# EAGLE board AS3364_DG412_bus_mixer_v1.0-old (EAGLE 7.7.0)

Size 88.88 x 49.2 mm. Coordinates in mm from the lower left corner, seen from the top.
Outline: 0,0 88.88,0 88.88,49.2 0,49.2 0,0
Copper layers (1*16): Top 0.035mm / dielectric 1.6mm / Bottom 0.035mm
Design rules "jlcpcb-2layers": minimum track width 5mil, minimum drill 0.3mm, track to track 5mil, track to pad 5mil, pad to pad 5mil, via to via 5mil, smd to smd 5mil, copper to edge 0.2mm, drill to drill 6mil, minimum pad ring 10mil, minimum via ring 3mil, stop-mask expansion 4mil, vias tented up to drill 0mil, thermal gap 10mil

## Footprints (pad centres in the part's own frame; a part is rotated, then mirrored left to right if it is on the bottom)
C0402 = smd 0.7 x 0.9: 1 -0.65,0; 2 0.65,0
DIL16J = drill 0.813: 1 -8.89,-3.81; 2 -6.35,-3.81; 3 -3.81,-3.81; 4 -1.27,-3.81; 5 1.27,-3.81; 6 3.81,-3.81; 7 6.35,-3.81; 8 8.89,-3.81; 9 8.89,3.81; 10 6.35,3.81; 11 3.81,3.81; 12 1.27,3.81; 13 -1.27,3.81; 14 -3.81,3.81; 15 -6.35,3.81; 16 -8.89,3.81
TSSOP24J = smd 0.305 x 0.991: 1 -3.575,-2.918; 2 -2.925,-2.918; 3 -2.275,-2.918; 4 -1.625,-2.918; 5 -0.975,-2.918; 6 -0.325,-2.918; 7 0.325,-2.918; 8 0.975,-2.918; 9 1.625,-2.918; 10 2.275,-2.918; 11 2.925,-2.918; 12 3.575,-2.918; 13 3.575,2.918; 14 2.925,2.918; 15 2.275,2.918; 16 1.625,2.918; 17 0.975,2.918; 18 0.325,2.918; 19 -0.325,2.918; 20 -0.975,2.918; 21 -1.625,2.918; 22 -2.275,2.918; 23 -2.925,2.918; 24 -3.575,2.918
TSSOP14J = smd 0.35 x 1: 1 -1.95,-2.825; 2 -1.3,-2.825; 3 -0.65,-2.825; 4 0,-2.825; 5 0.65,-2.825; 6 1.3,-2.825; 7 1.95,-2.825; 8 1.95,2.825; 9 1.3,2.825; 10 0.65,2.825; 11 0,2.825; 12 -0.65,2.825; 13 -1.3,2.825; 14 -1.95,2.825
TSSOP8J = smd 1.2 x 0.35: 1 -2.925,0.975; 2 -2.925,0.325; 3 -2.925,-0.325; 4 -2.925,-0.975; 5 2.925,-0.975; 6 2.925,-0.325; 7 2.925,0.325; 8 2.925,0.975
R0603 = smd 1 x 1.1: 1 -0.85,0; 2 0.85,0
R0402 = smd 0.6 x 0.7: 1 -0.5,0; 2 0.5,0
MA16-2WJ = drill 1.016 octagon: 1 -20.32,-1.27; 2 -20.32,1.27; 3 -17.78,-1.27; 4 -17.78,1.27; 5 -15.24,-1.27; 6 -15.24,1.27; 7 -12.7,-1.27; 8 -12.7,1.27; 9 -10.16,-1.27; 10 -10.16,1.27; 11 -7.62,-1.27; 12 -7.62,1.27; 13 -5.08,-1.27; 14 -5.08,1.27; 15 -2.54,-1.27; 16 -2.54,1.27; 17 0,-1.27; 18 0,1.27; 19 2.54,-1.27; 20 2.54,1.27; 21 5.08,-1.27; 22 5.08,1.27; 23 7.62,-1.27; 24 7.62,1.27; 25 10.16,-1.27; 26 10.16,1.27; 27 12.7,-1.27; 28 12.7,1.27; 29 15.24,-1.27; 30 15.24,1.27; 31 17.78,-1.27; 32 17.78,1.27

## Placement (x,y rotation side)
C1  100nF  [C0402]  16.51,20.32 0 top
C2  100nF  [C0402]  16.51,17.78 0 top
C3  100nF  [C0402]  41.91,20.32 0 top
C4  100nF  [C0402]  41.91,17.78 0 top
C5  100nF  [C0402]  67.31,20.32 0 top
C6  100nF  [C0402]  67.31,17.78 0 top
C7  100nF  [C0402]  8.89,35.56 0 top
C8  100nF  [C0402]  11.43,35.56 0 top
C9  100nF  [C0402]  30.48,36.83 0 top
C10  100nF  [C0402]  30.48,34.29 0 top
C11  100nF  [C0402]  58.42,36.83 0 top
C12  100nF  [C0402]  58.42,34.29 0 top
C13  5nF  [C0402]  7.62,12.7 0 top
C14  5nF  [C0402]  33.02,12.7 0 top
C15  5nF  [C0402]  58.42,12.7 0 top
C16  100nF  [C0402]  77.47,36.83 0 top
C17  100nF  [C0402]  77.47,34.29 0 top
C18  100nF  [C0402]  5.08,19.05 0 top
C19  100nF  [C0402]  31.75,17.78 0 top
C20  100nF  [C0402]  50.8,19.05 0 top
C21  100nF  [C0402]  59.69,17.78 0 top
C22  100nF  [C0402]  81.28,19.05 0 top
DA1  AS3364D  [DIL16J]  67.31,19.05 0 top
DA2  AS3364D  [DIL16J]  16.51,19.05 0 top
DA3  AS3364D  [DIL16J]  41.91,19.05 0 top
IC1  PCA9539PW  [TSSOP24J]  44.45,35.56 0 top
IC2  TL074JT  [TSSOP14J]  54.61,19.05 0 top
IC3  TL072JT  [TSSOP8J]  2.54,19.05 90 top
IC4  TL074JT  [TSSOP14J]  83.82,19.05 0 top
IC6  TL072JT  [TSSOP8J]  78.74,19.05 90 top
IC8  DG412-J  [DIL16J]  10.16,35.56 0 top
IC9  DG412-J  [DIL16J]  30.48,35.56 0 top
IC10  DG412-J  [DIL16J]  58.42,35.56 0 top
IC11  DG412-J  [DIL16J]  78.74,35.56 0 top
IC14  TL074JT  [TSSOP14J]  29.21,19.05 0 top
R1  1K  [R0603]  44.45,29.21 0 top
R2  33k  [R0402]  12.7,12.7 90 top
R3  22k  [R0402]  11.43,12.7 90 top
R4  47k  [R0402]  10.16,12.7 90 top
R5  33k  [R0402]  20.32,12.7 90 top
R6  22k  [R0402]  21.59,12.7 90 top
R7  47k  [R0402]  22.86,12.7 90 top
R8  33k  [R0402]  20.32,20.32 90 top
R9  22k  [R0402]  21.59,20.32 90 top
R10  47k  [R0402]  22.86,20.32 90 top
R11  33k  [R0402]  12.7,20.32 90 top
R12  22k  [R0402]  11.43,20.32 90 top
R13  47k  [R0402]  10.16,20.32 90 top
R14  33k  [R0402]  38.1,12.7 90 top
R15  22k  [R0402]  36.83,12.7 90 top
R16  47k  [R0402]  35.56,12.7 90 top
R17  33k  [R0402]  45.72,12.7 90 top
R18  22k  [R0402]  46.99,12.7 90 top
R19  47k  [R0402]  48.26,12.7 90 top
R20  33k  [R0402]  45.72,20.32 90 top
R21  22k  [R0402]  46.99,20.32 90 top
R22  47k  [R0402]  48.26,20.32 90 top
R23  33k  [R0402]  38.1,20.32 90 top
R24  22k  [R0402]  36.83,20.32 90 top
R25  47k  [R0402]  35.56,20.32 90 top
R26  33k  [R0402]  63.5,12.7 90 top
R27  22k  [R0402]  62.23,12.7 90 top
R28  47k  [R0402]  60.96,12.7 90 top
R29  33k  [R0402]  71.12,12.7 270 top
R30  22k  [R0402]  72.39,12.7 270 top
R31  47k  [R0402]  73.66,12.7 90 top
R32  33k  [R0402]  71.12,20.32 90 top
R33  22k  [R0402]  72.39,20.32 90 top
R34  47k  [R0402]  73.66,20.32 90 top
R35  33k  [R0402]  63.5,20.32 90 top
R36  22k  [R0402]  62.23,20.32 270 top
R37  47k  [R0402]  60.96,20.32 90 top
R38  100R  [R0402]  7.62,11.43 0 top
R39  100R  [R0402]  33.02,10.16 0 top
R40  100R  [R0402]  57.15,10.16 0 top
R41  47k  [R0402]  2.54,24.13 0 top
R42  47k  [R0402]  27.94,24.13 0 top
R43  47k  [R0402]  27.94,13.97 0 top
R44  47k  [R0402]  2.54,13.97 0 top
R45  47k  [R0402]  30.48,13.97 0 top
R46  47k  [R0402]  53.34,13.97 0 top
R47  47k  [R0402]  53.34,24.13 0 top
R48  47k  [R0402]  30.48,24.13 0 top
R49  47k  [R0402]  55.88,24.13 0 top
R50  47k  [R0402]  78.74,13.97 0 top
R51  47k  [R0402]  78.74,24.13 0 top
R52  47k  [R0402]  55.88,13.97 0 top
R53  47k  [R0402]  16.51,29.21 0 top
R54  47k  [R0402]  15.24,36.83 0 top
R55  47k  [R0402]  35.56,30.48 180 top
R56  47k  [R0402]  35.56,36.83 180 top
R57  47k  [R0402]  24.13,30.48 180 top
R58  47k  [R0402]  24.13,36.83 180 top
R59  47k  [R0402]  5.08,29.21 180 top
R60  47k  [R0402]  5.08,36.83 180 top
R61  47k  [R0402]  64.77,29.21 180 top
R62  47k  [R0402]  63.5,36.83 180 top
R63  47k  [R0402]  83.82,30.48 180 top
R64  47k  [R0402]  83.82,36.83 180 top
R65  47k  [R0402]  72.39,30.48 180 top
R66  47k  [R0402]  72.39,36.83 180 top
R67  47k  [R0402]  52.07,29.21 180 top
R68  47k  [R0402]  52.07,36.83 180 top
R69  100k  [R0603]  68.58,5.08 0 top
R70  100k  [R0603]  78.74,8.89 0 top
R71  100k  [R0603]  83.82,8.89 0 top
R72  100k  [R0603]  80.01,6.35 0 top
R73  220k  [R0402]  71.12,1.27 0 top
R74  220k  [R0402]  67.31,1.27 0 top
R75  220k  [R0402]  85.09,12.7 0 top
R76  220k  [R0402]  85.09,25.4 0 top
R77  105k  [R0603]  31.75,43.18 0 top
R78  75k  [R0603]  26.67,43.18 0 top
R79  47k  [R0402]  74.93,1.27 0 top
R80  47k  [R0402]  80.01,1.27 0 top
R81  47k  [R0402]  85.09,13.97 0 top
R82  47k  [R0402]  85.09,24.13 0 top
SV1  [MA16-2WJ]  19.05,5.08 180 top

## Library data of the parts
C1-C22 = rcl; SPICEPREFIX: C
DA1-DA3 IC1-IC4 IC6 IC8-IC11 IC14 = joakim
R1-R82 = rcl; SPICEPREFIX: R
SV1 = joakim; OC_FARNELL: unknown; OC_NEWARK: unknown

## Nets
+3V3: IC1.24 R1.1 SV1.31
+12V: C1.2 C3.2 C5.2 C7.2 C9.2 C11.2 C16.2 C18.2 C19.2 C20.2 C21.2 C22.2 DA1.16 DA2.16 DA3.16 IC2.4 IC3.8 IC4.4 IC6.8 IC8.13 IC9.13 IC10.13 IC11.13 IC14.4 R77.1 SV1.18
-12V: C2.1 C4.1 C6.1 C8.1 C10.1 C12.1 C17.1 C18.1 C19.1 C20.1 C21.1 C22.1 DA1.9 DA2.9 DA3.9 IC2.11 IC3.4 IC4.11 IC6.4 IC8.4 IC9.4 IC10.4 IC11.4 IC14.11 SV1.15
BUS_A: IC4.2 IC8.3 IC8.6 IC9.3 IC9.6 IC10.3 IC10.6 R73.2 R79.1
BUS_B: IC4.13 IC8.11 IC8.14 IC9.11 IC9.14 IC10.11 IC10.14 R74.2 R80.1
BUS_FX_A: IC4.6 IC11.3 IC11.6 R75.2 R81.1
BUS_FX_B: IC4.9 IC11.11 IC11.14 R76.2 R82.1
CON1: DA2.13 IC3.3 R44.2
CON2: DA2.4 IC3.5 R41.2
CON3: DA2.12 IC14.3 R43.2
CON4: DA2.5 IC14.12 R42.2
CON5: DA3.13 IC14.5 R48.2
CON6: DA3.4 IC14.10 R45.2
CON7: DA3.12 IC2.3 R47.2
CON8: DA3.5 IC2.12 R46.2
CON_O1: DA1.13 IC2.5 R52.2
CON_O2: DA1.4 IC2.10 R49.2
CON_O3: DA1.12 IC6.3 R51.2
CON_O4: DA1.5 IC6.5 R50.2
CV1: R11.1 SV1.26
CV2: R2.1 SV1.24
CV2_IN: DA2.3 R2.2 R3.2
CV3: R8.1 SV1.22
CV4: R5.1 SV1.20
CV5: R23.1 SV1.12
CV6: R14.1 SV1.10
CV6_IN: DA3.3 R14.2 R15.2
CV7: R20.1 SV1.8
CV8: R17.1 SV1.6
CV_A_DRY: R35.1
CV_A_WET: R32.1
CV_B_DRY: R26.1
CV_B_WET: R29.1
CV_O2: DA1.3 R26.2 R27.2
DGND: IC1.2 IC1.12 IC1.21 SV1.29
DIG_1_BUS_A: IC1.4 IC8.1
DIG_1_BUS_B: IC1.5 IC8.16
DIG_2_BUS_A: IC1.6 IC8.8
DIG_2_BUS_B: IC1.7 IC8.9
DIG_3_BUS_A: IC1.8 IC9.1
DIG_3_BUS_B: IC1.9 IC9.16
DIG_4_BUS_A: IC1.10 IC9.8
DIG_4_BUS_B: IC1.11 IC9.9
DIG_5_BUS_A: IC1.13 IC10.1
DIG_5_BUS_B: IC1.14 IC10.16
DIG_6_BUS_A: IC1.15 IC10.8
DIG_6_BUS_B: IC1.16 IC10.9
DIG_7_BUS_A: IC1.17 IC11.1
DIG_7_BUS_B: IC1.18 IC11.16
DIG_8_BUS_A: IC1.19 IC11.8
DIG_8_BUS_B: IC1.20 IC11.9
GND: C1.1 C2.2 C3.1 C4.2 C5.1 C6.2 C7.1 C8.2 C9.1 C10.2 C11.1 C12.2 C13.1 C14.1 C15.1 C16.1 C17.2 DA1.8 DA2.8 DA3.8 IC4.3 IC4.5 IC4.10 IC4.12 IC8.5 IC9.5 IC10.5 IC11.5 R3.1 R6.1 R9.1 R12.1 R15.1 R18.1 R21.1 R24.1 R27.1 R30.1 R33.1 R36.1 R41.1 R42.1 R43.1 R44.1 R45.1 R46.1 R47.1 R48.1 R49.1 R50.1 R51.1 R52.1 R73.1 R74.1 R75.1 R76.1 R78.2 SV1.17
IN1: R13.1 SV1.25
IN2: R4.1 SV1.23
IN3: R10.1 SV1.21
IN4: R7.1 SV1.19
IN5: R25.1 SV1.11
IN6: R16.1 SV1.9
IN7: R22.1 SV1.7
IN8: R19.1 SV1.5
IN_O1: DA1.15 R37.2
IN_O2: DA1.2 R28.2
IN_O3: DA1.10 R34.2
IN_O4: DA1.7 R31.2
LPF_IN_100K_MIX: R70.2 R72.2
N$1: DA3.1 R39.2
N$2: DA2.1 R38.2
N$3: DA3.6 R17.2 R18.2
N$4: IC8.12 IC9.12 IC10.12 IC11.12 R77.2 R78.1
N$5: DA3.11 R20.2 R21.2
N$7: DA3.14 R23.2 R24.2
N$8: C14.2 R39.1
N$9: DA1.1 R40.2
N$10: DA2.6 R5.2 R6.2
N$11: DA1.6 R29.2 R30.2
N$12: DA2.11 R8.2 R9.2
N$13: DA1.11 R32.2 R33.2
N$14: C13.2 R38.1
N$15: DA1.14 R35.2 R36.2
N$16: C15.2 R40.1
N$21: DA2.14 R11.2 R12.2
N$81: IC1.3 R1.2
OUT1: IC3.1 IC3.2 R59.1 R60.1
OUT2: IC3.6 IC3.7 R53.1 R54.1
OUT3: IC14.1 IC14.2 R57.1 R58.1
OUT4: IC14.13 IC14.14 R55.1 R56.1
OUT5: IC14.6 IC14.7 R67.1 R68.1
OUT6: IC14.8 IC14.9 R61.1 R62.1
OUT7: IC2.1 IC2.2 R65.1 R66.1
OUT8: IC2.13 IC2.14 R63.1 R64.1
OUT_A: IC2.6 IC2.7 R69.1
OUT_B: IC2.8 IC2.9 R70.1
OUT_FX_A: IC6.1 IC6.2 R71.1
OUT_FX_B: IC6.6 IC6.7 R72.1
SCL: IC1.22 SV1.32
SDA: IC1.23 SV1.30
SUM1: DA2.15 R13.2
SUM2: DA2.2 R4.2
SUM3: DA2.10 R10.2
SUM4: DA2.7 R7.2
SUM5: DA3.15 R25.2
SUM6: DA3.2 R16.2
SUM7: DA3.10 R22.2
SUM8: DA3.7 R19.2
SUM_A: IC4.1 R37.1 R79.2
SUM_B: IC4.14 R28.1 R80.2
SUM_FX_A: IC4.7 R34.1 R81.2
SUM_FX_B: IC4.8 R31.1 R82.2
SVF_IN_100K_MIX: R69.2 R71.2
SW1A: IC8.2 R59.2
SW1B: IC8.15 R60.2
SW2A: IC8.7 R53.2
SW2B: IC8.10 R54.2
SW3A: IC9.2 R57.2
SW3B: IC9.15 R58.2
SW4A: IC9.7 R55.2
SW4B: IC9.10 R56.2
SW5A: IC10.2 R67.2
SW5B: IC10.15 R68.2
SW6A: IC10.7 R61.2
SW6B: IC10.10 R62.2
SW7A: IC11.2 R65.2
SW7B: IC11.15 R66.2
SW8A: IC11.7 R63.2
SW8B: IC11.10 R64.2

## Tracks (layer width: path | path; a pad name or v marks a point on that pad's centre or on a via)
+3V3  (2 unrouted)
+12V  (25 unrouted)
-12V  (24 unrouted)
BUS_A  (8 unrouted)
BUS_B  (8 unrouted)
BUS_FX_A  (4 unrouted)
BUS_FX_B  (4 unrouted)
CON1  (2 unrouted)
CON2  (2 unrouted)
CON3  (2 unrouted)
CON4  (2 unrouted)
CON5  (2 unrouted)
CON6  (2 unrouted)
CON7  (2 unrouted)
CON8  (2 unrouted)
CON_O1  (2 unrouted)
CON_O2  (2 unrouted)
CON_O3  (2 unrouted)
CON_O4  (2 unrouted)
CV1  (1 unrouted)
CV2  (1 unrouted)
CV2_IN  (2 unrouted)
CV3  (1 unrouted)
CV4  (1 unrouted)
CV5  (1 unrouted)
CV6  (1 unrouted)
CV6_IN  (2 unrouted)
CV7  (1 unrouted)
CV8  (1 unrouted)
CV_O2  (2 unrouted)
DGND  (3 unrouted)
DIG_1_BUS_A  (1 unrouted)
DIG_1_BUS_B  (1 unrouted)
DIG_2_BUS_A  (1 unrouted)
DIG_2_BUS_B  (1 unrouted)
DIG_3_BUS_A  (1 unrouted)
DIG_3_BUS_B  (1 unrouted)
DIG_4_BUS_A  (1 unrouted)
DIG_4_BUS_B  (1 unrouted)
DIG_5_BUS_A  (1 unrouted)
DIG_5_BUS_B  (1 unrouted)
DIG_6_BUS_A  (1 unrouted)
DIG_6_BUS_B  (1 unrouted)
DIG_7_BUS_A  (1 unrouted)
DIG_7_BUS_B  (1 unrouted)
DIG_8_BUS_A  (1 unrouted)
DIG_8_BUS_B  (1 unrouted)
GND  (57 unrouted)
IN1  (1 unrouted)
IN2  (1 unrouted)
IN3  (1 unrouted)
IN4  (1 unrouted)
IN5  (1 unrouted)
IN6  (1 unrouted)
IN7  (1 unrouted)
IN8  (1 unrouted)
IN_O1  (1 unrouted)
IN_O2  (1 unrouted)
IN_O3  (1 unrouted)
IN_O4  (1 unrouted)
LPF_IN_100K_MIX  (1 unrouted)
N$1  (1 unrouted)
N$2  (1 unrouted)
N$3  (2 unrouted)
N$4  (5 unrouted)
N$5  (2 unrouted)
N$7  (2 unrouted)
N$8  (1 unrouted)
N$9  (1 unrouted)
N$10  (2 unrouted)
N$11  (2 unrouted)
N$12  (2 unrouted)
N$13  (2 unrouted)
N$14  (1 unrouted)
N$15  (2 unrouted)
N$16  (1 unrouted)
N$21  (2 unrouted)
N$81  (1 unrouted)
OUT1  (3 unrouted)
OUT2  (3 unrouted)
OUT3  (3 unrouted)
OUT4  (3 unrouted)
OUT5  (3 unrouted)
OUT6  (3 unrouted)
OUT7  (3 unrouted)
OUT8  (3 unrouted)
OUT_A  (2 unrouted)
OUT_B  (2 unrouted)
OUT_FX_A  (2 unrouted)
OUT_FX_B  (2 unrouted)
SCL  (1 unrouted)
SDA  (1 unrouted)
SUM1  (1 unrouted)
SUM2  (1 unrouted)
SUM3  (1 unrouted)
SUM4  (1 unrouted)
SUM5  (1 unrouted)
SUM6  (1 unrouted)
SUM7  (1 unrouted)
SUM8  (1 unrouted)
SUM_A  (2 unrouted)
SUM_B  (2 unrouted)
SUM_FX_A  (2 unrouted)
SUM_FX_B  (2 unrouted)
SVF_IN_100K_MIX  (1 unrouted)
SW1A  (1 unrouted)
SW1B  (1 unrouted)
SW2A  (1 unrouted)
SW2B  (1 unrouted)
SW3A  (1 unrouted)
SW3B  (1 unrouted)
SW4A  (1 unrouted)
SW4B  (1 unrouted)
SW5A  (1 unrouted)
SW5B  (1 unrouted)
SW6A  (1 unrouted)
SW6B  (1 unrouted)
SW7A  (1 unrouted)
SW7B  (1 unrouted)
SW8A  (1 unrouted)
SW8B  (1 unrouted)